# EAGLE board LilyPadSR (EAGLE 6.0)
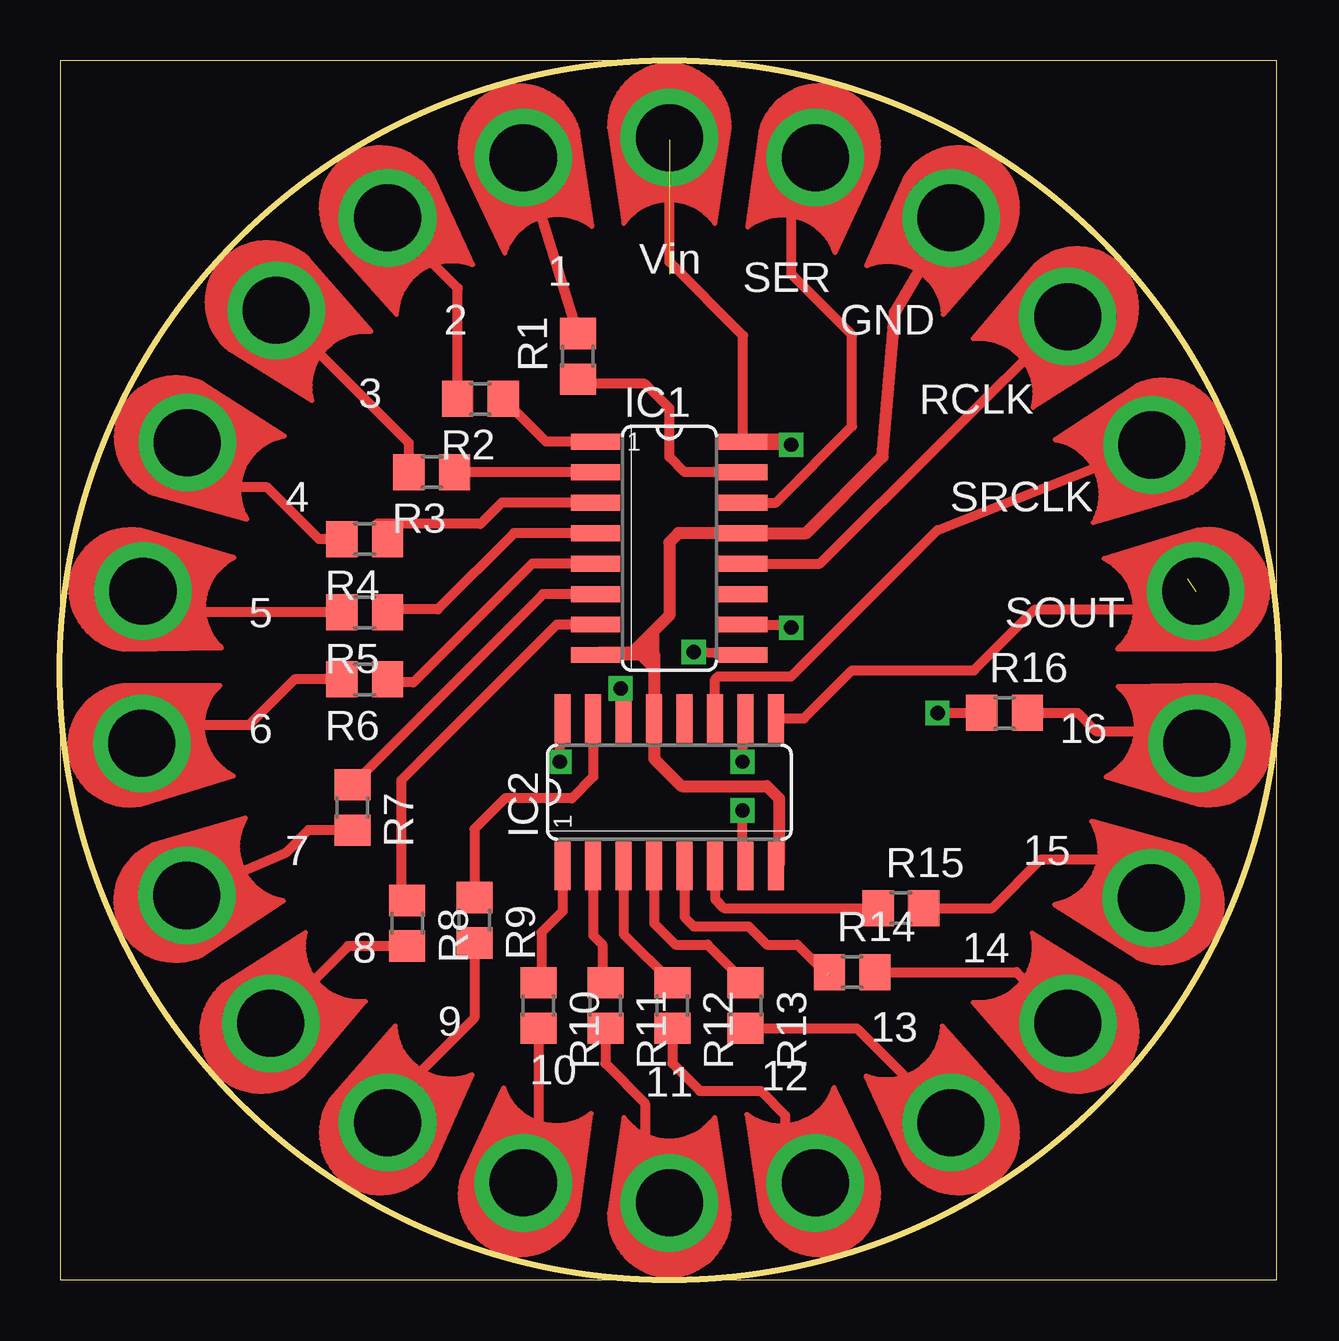
[diagram p0: board, top side]
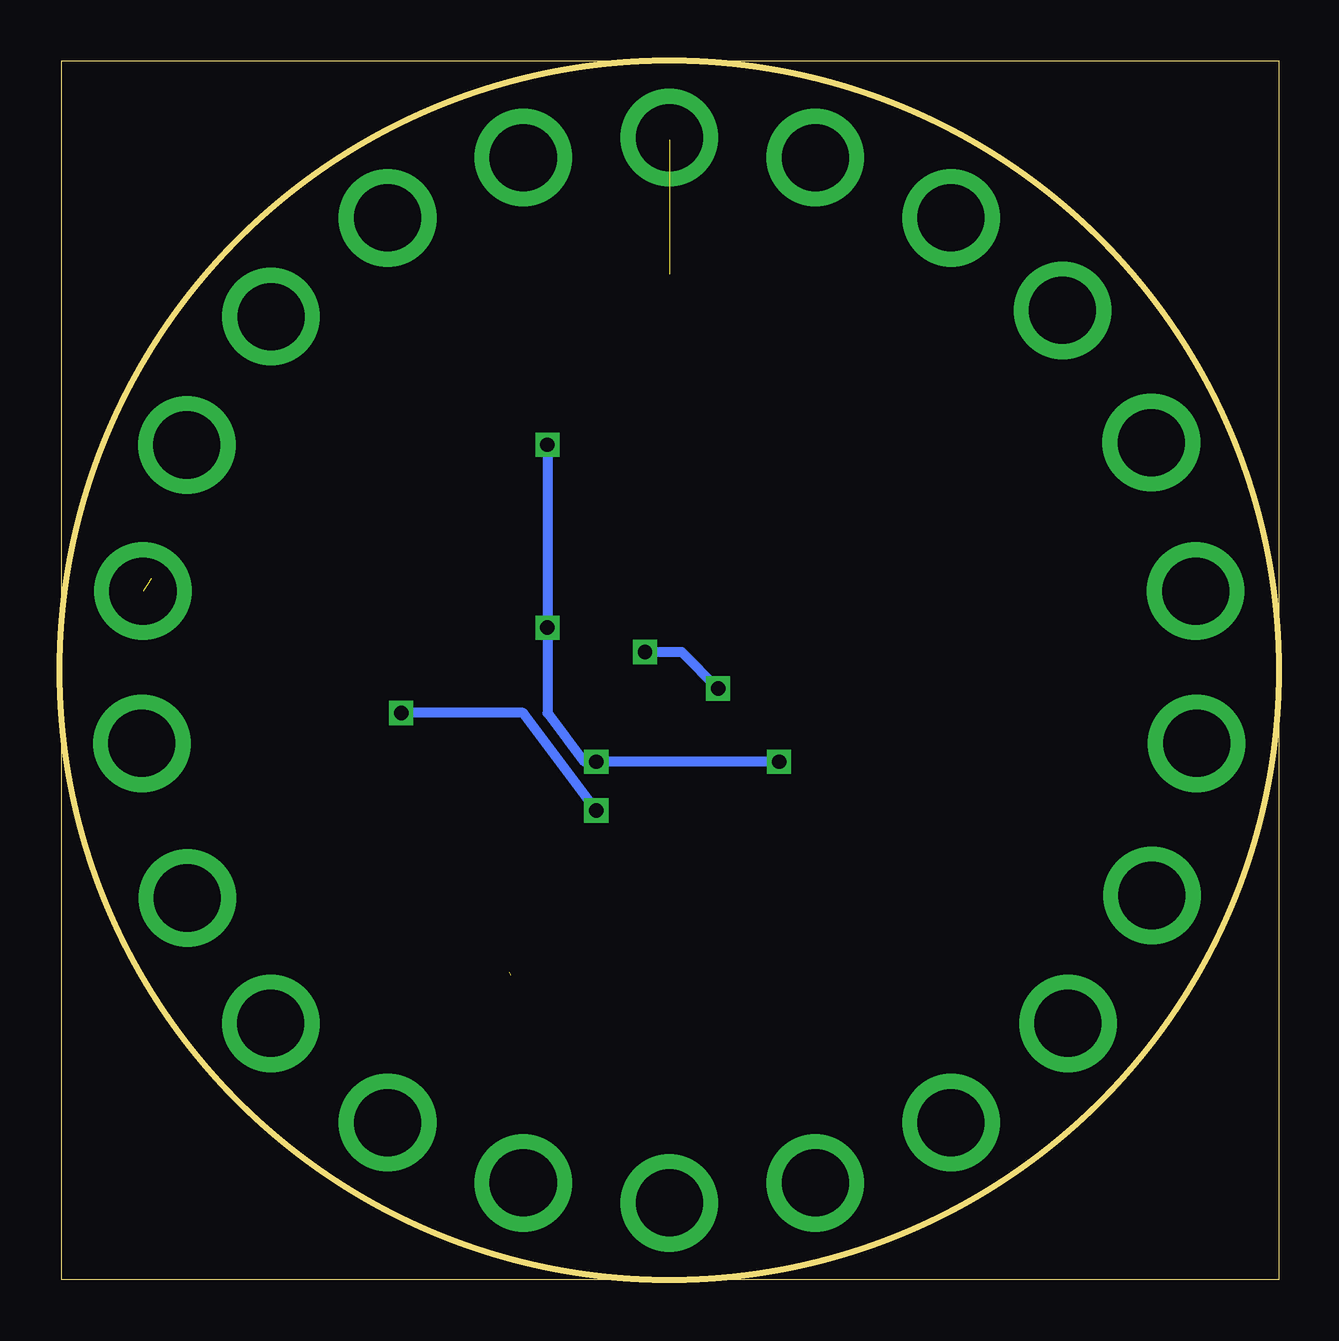
[diagram p1: board, bottom side, seen from below]

Size 50.8 x 50.8 mm. Coordinates in mm from the lower left corner, seen from the top.
Outline: 0,0 50.72,0 50.72,50.79 0,50.79 0,0
Outline: circle at 25.4,25.4 radius 25.4
Copper layers (1*16): Top 0.035mm / dielectric 1.5mm / Bottom 0.035mm
Design rules: minimum track width 10mil, minimum drill 24mil, track to track 8mil, track to pad 8mil, pad to pad 8mil, via to via 8mil, smd to smd 8mil, copper to edge 40mil, drill to drill 8mil, minimum pad ring 10mil, minimum via ring 8mil, stop-mask expansion 4mil, vias tented up to drill 0mil, thermal gap 10mil

## Footprints (pad centres in the part's own frame; a part is rotated, then mirrored left to right if it is on the bottom)
SO16 = smd 0.66 x 2.032: 1 -4.445,-3.073; 2 -3.175,-3.073; 3 -1.905,-3.073; 4 -0.635,-3.073; 5 0.635,-3.073; 6 1.905,-3.073; 7 3.175,-3.073; 8 4.445,-3.073; 9 4.445,3.073; 10 3.175,3.073; 11 1.905,3.073; 12 0.635,3.073; 13 -0.635,3.073; 14 -1.905,3.073; 15 -3.175,3.073; 16 -4.445,3.073
R0805 = smd 1.3 x 1.5: 1 -0.95,0; 2 0.95,0
PETAL-LONG-1 = drill 2.794 pad 4.064: 1 0.03,0

## Placement (x,y rotation side)
IC1  74HC595D  [SO16]  25.4,30.48 270 top
IC2  74HC595D  [SO16]  25.4,20.32 0 top
R1  82  [R0805]  21.59,38.48 90 top
R2  82  [R0805]  17.53,36.71 180 top
R3  82  [R0805]  15.49,33.65 180 top
R4  82  [R0805]  12.7,30.86 180 top
R5  82  [R0805]  12.7,27.81 180 top
R6  82  [R0805]  12.7,25.02 180 top
R7  82  [R0805]  12.19,19.69 270 top
R8  82  [R0805]  14.48,14.86 270 top
R9  82  [R0805]  17.27,14.99 270 top
R10  82  [R0805]  19.94,11.43 270 top
R11  82  [R0805]  22.73,11.43 270 top
R12  82  [R0805]  25.53,11.43 270 top
R13  82  [R0805]  28.58,11.43 270 top
R14  82  [R0805]  33.02,12.83 0 top
R15  82  [R0805]  35.05,15.49 0 top
R16  82  [R0805]  39.37,23.62 0 top
U$1  SEWTAP1  [PETAL-LONG-1]  47.37,28.7 188.5 top
U$2  SEWTAP1  [PETAL-LONG-1]  19.3,46.79 287 top
U$3  SEWTAP1  [PETAL-LONG-1]  13.64,44.27 303.3 top
U$4  SEWTAP1  [PETAL-LONG-1]  8.99,40.41 319.6 top
U$5  SEWTAP1  [PETAL-LONG-1]  5.28,34.9 335.9 top
U$6  SEWTAP1  [PETAL-LONG-1]  3.43,28.7 352.2 top
U$7  SEWTAP1  [PETAL-LONG-1]  3.39,22.35 8.5 top
U$8  SEWTAP1  [PETAL-LONG-1]  5.26,16 24.8 top
U$9  SEWTAP1  [PETAL-LONG-1]  8.76,10.67 41.1 top
U$10  SEWTAP1  [PETAL-LONG-1]  13.64,6.53 57.4 top
U$11  SEWTAP1  [PETAL-LONG-1]  19.3,4.01 73.7 top
U$12  SEWTAP1  [PETAL-LONG-1]  25.4,3.17 90 top
U$13  SEWTAP1  [PETAL-LONG-1]  31.5,4.01 107 top
U$14  SEWTAP1  [PETAL-LONG-1]  37.16,6.53 123.3 top
U$15  SEWTAP1  [PETAL-LONG-1]  42.04,10.67 139.6 top
U$16  SEWTAP1  [PETAL-LONG-1]  45.52,15.9 155.9 top
U$17  SEWTAP1  [PETAL-LONG-1]  47.42,22.35 172.2 top
U$18  SEWTAP1  [PETAL-LONG-1]  31.5,46.79 253.7 top
U$19  SEWTAP1  [PETAL-LONG-1]  42.02,40.16 221.1 top
U$20  SEWTAP1  [PETAL-LONG-1]  45.54,34.8 204.8 top
U$21  SEWTAP1  [PETAL-LONG-1]  25.4,47.62 270 top
U$22  SEWTAP1  [PETAL-LONG-1]  37.16,44.27 237.4 top

## Library data of the parts
IC1 IC2 = 74xx-eu
R1-R16 = rcl
U$1-U$22 = LilyPad-Wearables

## Nets
GND: IC1.8 IC1.13 IC2.8 IC2.13 U$22.1
N$1: IC1.15 R1.1
N$2: IC1.1 R2.1
N$3: IC1.2 R3.1
N$4: IC1.3 R4.1
N$5: IC1.4 R5.1
N$6: IC1.5 R6.1
N$7: IC1.6 R7.1
N$8: IC1.7 R8.1
N$9: IC2.15 R9.1
N$10: IC2.1 R10.1
N$11: IC2.2 R11.1
N$12: IC2.3 R12.1
N$13: IC2.4 R13.1
N$14: IC2.5 R14.1
N$15: IC2.6 R15.1
N$16: IC2.7 R16.1
N$17: IC1.9 IC2.14
Q1: R1.2 U$2.1
Q2: R2.2 U$3.1
Q3: R3.2 U$4.1
Q4: R4.2 U$5.1
Q5: R5.2 U$6.1
Q6: R6.2 U$7.1
Q7: R7.2 U$8.1
Q8: R8.2 U$9.1
Q9: R9.2 U$10.1
Q10: R10.2 U$11.1
Q11: R11.2 U$12.1
Q12: R12.2 U$13.1
Q13: R13.2 U$14.1
Q14: R14.2 U$15.1
Q15: R15.2 U$16.1
Q16: R16.2 U$17.1
RCLK: IC1.12 U$19.1
S_OUT: IC2.9 U$1.1
SER: IC1.14 U$18.1
SRCLK: IC2.11 U$20.1
VCC: IC1.10 IC1.16 IC2.10 IC2.16

## Tracks (layer width: path | path; a pad name or v marks a point on that pad's centre or on a via)
GND
  Top 0.406: 23.88,26.16 22.45,26.16 IC1.8 24.77,26.03 | 29.97,17.37 IC2.8
  Top 0.508: U$22.1 34.8,40.3 34.29,34.29 31.11,31.12 IC1.13 25.78,31.12 25.4,30.73 25.4,27.69 23.88,26.16 | 24.77,26.03 IC2.13 24.77,21.72 25.91,20.57 29.46,20.57 29.97,20.07 29.97,17.37
N$1
  Top 0.406: IC1.15 26.04,33.66 25.4,34.29 25.4,36.32 24.38,37.34 21.78,37.34 R1.1
N$2
  Top 0.406: IC1.1 20.26,34.93 R2.1
N$3
  Top 0.406: IC1.2 R3.1 | R3.1
N$4
  Top 0.406: IC1.3 18.41,32.38 17.53,31.5 13.21,31.5 13.21,31.3 R4.1
N$5
  Top 0.406: IC1.4 18.92,31.12 15.75,27.94 13.78,27.94 R5.1
N$6
  Top 0.406: IC1.5 19.68,29.84 14.73,24.89 13.78,24.89 R6.1
N$7
  Top 0.406: IC1.6 | IC1.6 20.13,28.57 R7.1
N$8
  Top 0.406: IC1.7 20.7,27.3 14.22,20.83 14.22,16.06 R8.1
N$9
  Top 0.406: IC2.15 22.23,20.95 21.34,20.07 18.54,20.07 17.27,18.8 R9.1
N$10
  Top 0.406: IC2.1 20.95,15.37 20.07,14.48 20.07,12.51 R10.1
N$11
  Top 0.406: IC2.2 22.23,14.35 22.61,13.97 22.61,12.51 R11.1
N$12
  Top 0.406: IC2.3 23.5,14.41 R12.1
N$13
  Top 0.406: IC2.4 24.77,14.86 25.65,13.97 26.99,13.97 R13.1
N$14  (1 unrouted)
  Top 0.406: IC2.5 26.04,15.11 26.42,14.73 28.7,14.73 29.46,13.97 30.73,13.97 32,12.7 32,12.95
N$15
  Top 0.406: IC2.6 27.3,15.88 27.69,15.49 R15.1
N$16  (via drill 0.6)
  Top 0.406: IC2.7 28.45,17.25 v28.45,19.56 | v36.58,23.62 R16.1
  Bottom 0.406: v28.45,19.56 31.5,23.62 v36.58,23.62
N$17  (via drill 0.6)
  Top 0.406: IC2.14 v23.37,24.64 | IC1.9 v26.42,26.16
  Bottom 0.406: v26.42,26.16 24.89,26.16 v23.37,24.64
Q1
  Top 0.406: R1.2 U$2.1
Q2
  Top 0.406: R2.2 16.58,41.33 U$3.1
Q3
  Top 0.406: R3.2 14.54,34.86 U$4.1
Q4
  Top 0.406: R4.2 10.79,30.86 8.64,33.02 7.18,33.02 U$5.1
Q5
  Top 0.406: R5.2 4.34,27.81 U$6.1
Q6
  Top 0.406: R6.2 9.78,25.02 7.87,23.11 4.17,23.11 U$7.1
Q7
  Top 0.406: R7.2 10.35,18.73 9.4,17.78 U$8.1
Q8
  Top 0.406: R8.2 12.01,13.91 U$9.1
Q9
  Top 0.406: R9.2 17.27,10.92 14.99,8.64 14.99,7.88 U$10.1
Q10
  Top 0.406: R10.2 19.94,4.67 U$11.1
Q11
  Top 0.406: R11.2 22.73,9.02 24.38,7.37 24.38,4.22 U$12.1
Q12
  Top 0.406: R12.2 25.53,9.02 26.67,7.87 29.21,7.87 30.23,6.86 30.23,5.3 U$13.1
Q13
  Top 0.406: R13.2 33.22,10.48 U$14.1
Q14
  Top 0.406: R14.2 39.88,12.83 U$15.1
Q15
  Top 0.406: R15.2 38.86,15.49 40.89,17.53 43.88,17.53 U$16.1
Q16
  Top 0.406: R16.2 42.42,23.62 43.18,22.86 46.84,22.86 U$17.1
RCLK
  Top 0.406: IC1.12 31.67,29.84 U$19.1
S$1
  Top 0.406: 24.73,25.46 24.01,26.18
S_OUT  (1 unrouted)
  Top 0.406: IC2.9 31.01,23.39 33.02,25.4 38.1,25.4 40.64,27.94 45.72,27.94 46.99,29.21
SER
  Top 0.406: IC1.14 29.84,32.38 33.02,35.56 33.02,39.37 30.48,41.91 30.48,45.7 U$18.1
SRCLK
  Top 0.406: IC2.11 27.3,25.02 27.43,25.15 30.48,25.15 36.58,31.24 U$20.1
VCC  (via drill 0.6)  (1 unrouted)
  Top 0.406: IC1.10 30.48,27.3 v30.48,27.18 | IC2.10 28.45,23.39 v28.45,21.59 28.45,23.11 | IC2.16 20.83,23.39 v20.83,21.59 | 29.21,35.05 30.48,35.05 v30.48,34.8 28.47,34.8 IC1.16 28.47,39.35 25.4,42.42 25.4,47.5
  Bottom 0.406: v30.48,34.8 v30.48,27.18 30.48,23.62 28.96,21.59 v28.45,21.59 v20.83,21.59
(copper drawn outside any net)
  shapes: Top area x3

## Text on the board
tPlace: 1 | Vin | SER | 2 | GND | 3 | RCLK | 1 | 4 | SRCLK | 5 | SOUT | 6 | 16 | 1 | 7 | 15 | 8 | 8 | 14 | 9 | 13 | 10 | 11 | 12